# Altium PCB STM32F4.PcbDoc
Units mm, origin at the board's own origin, x right, y up, seen from the top; angles counter-clockwise.
Board outline 37.5 x 37.5 mm, 4 copper layers (L1 (Signal), L2 (GND), L3 (GND), L4 (Signal)), stack 1.57 mm thick; 35 components, 27 nets, 172 pads, 110 vias.
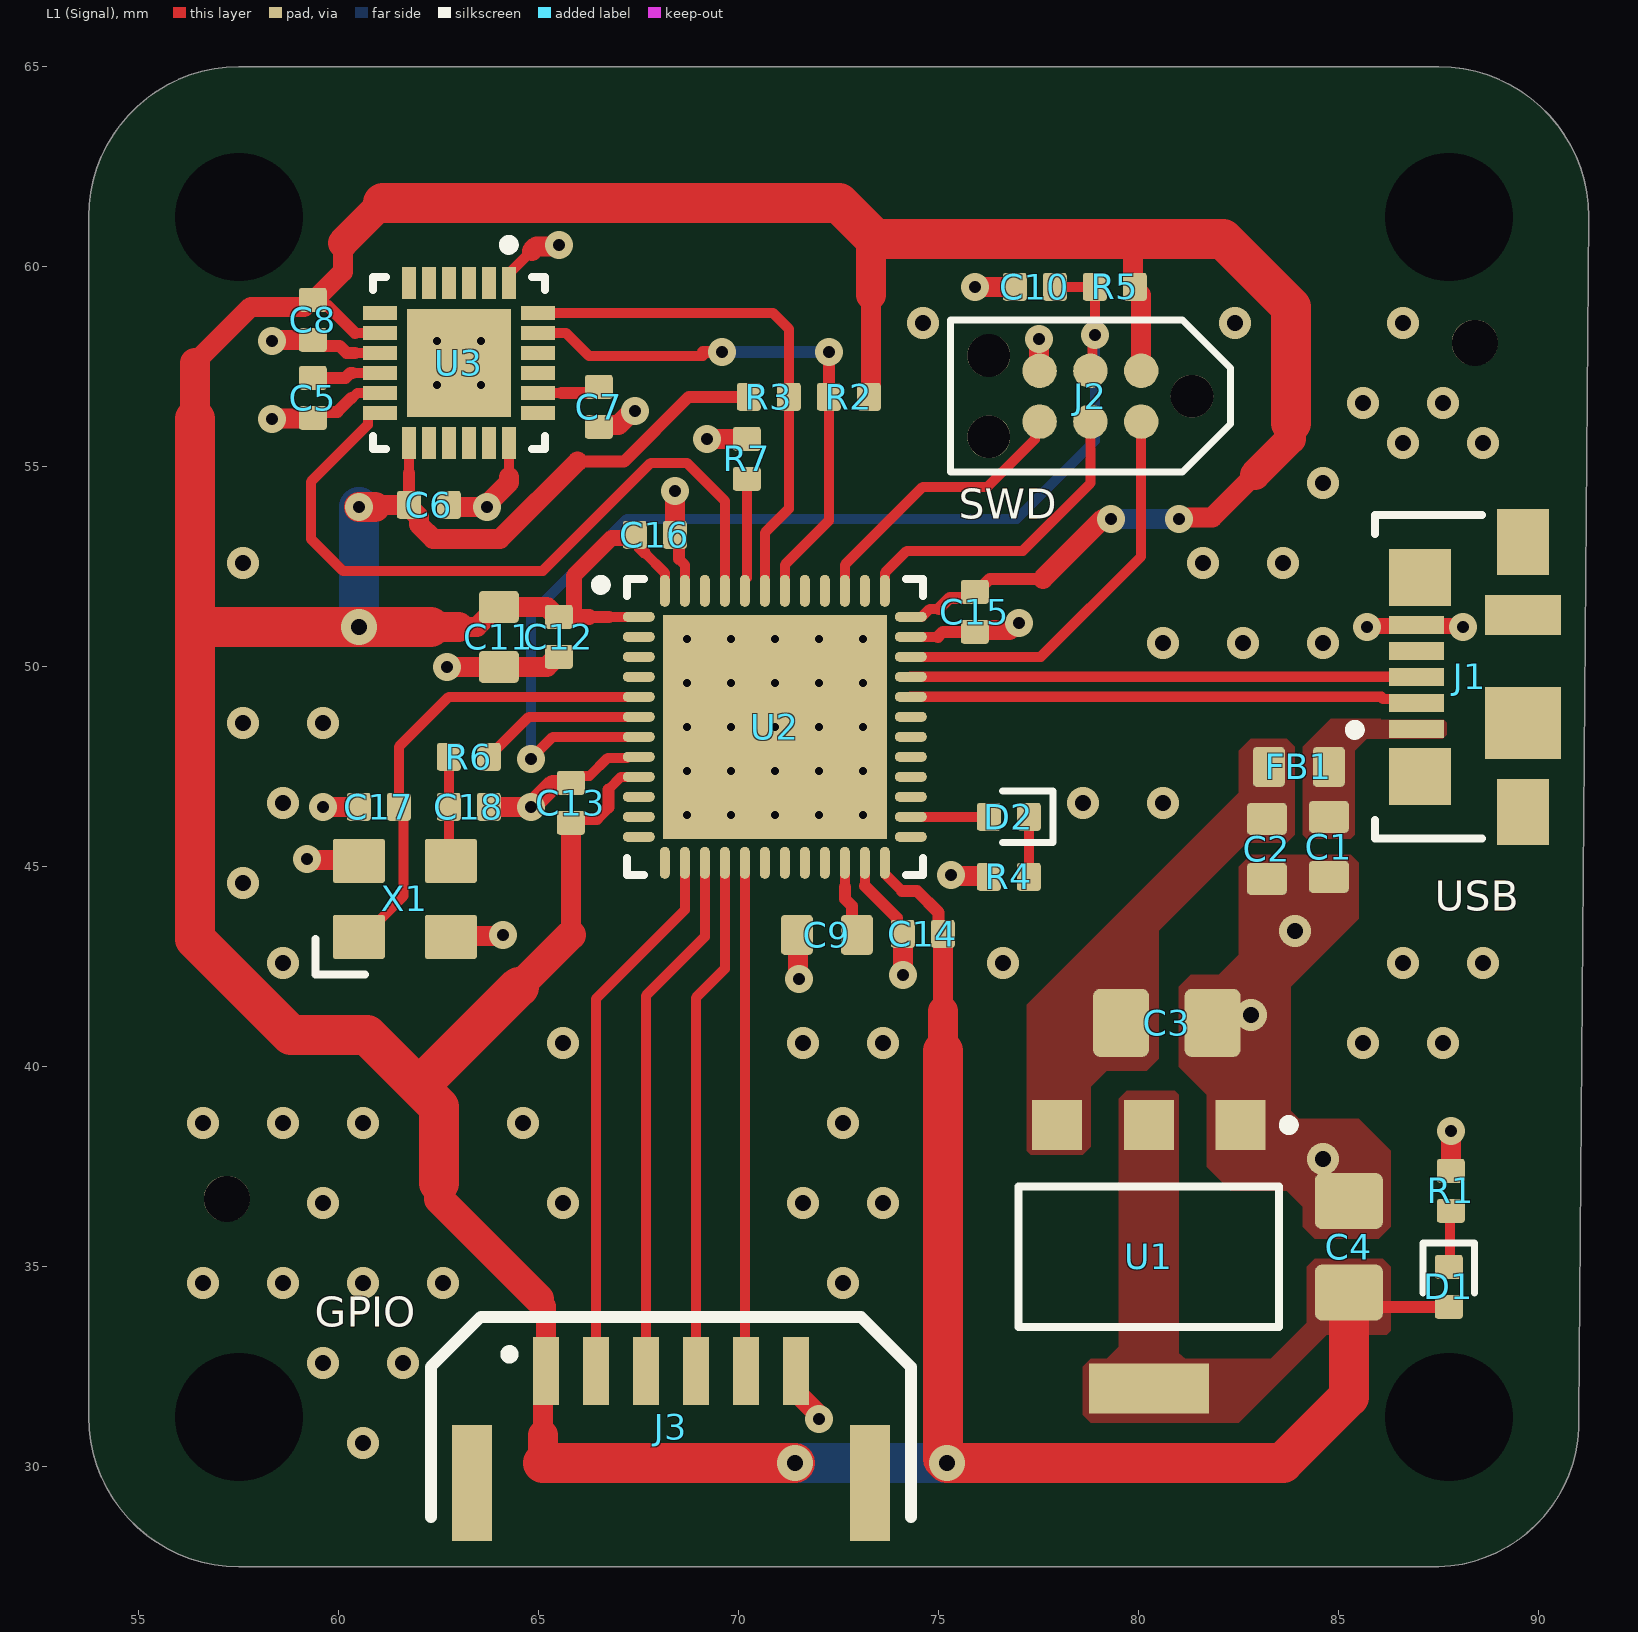
[diagram p0: L1 (Signal) view]
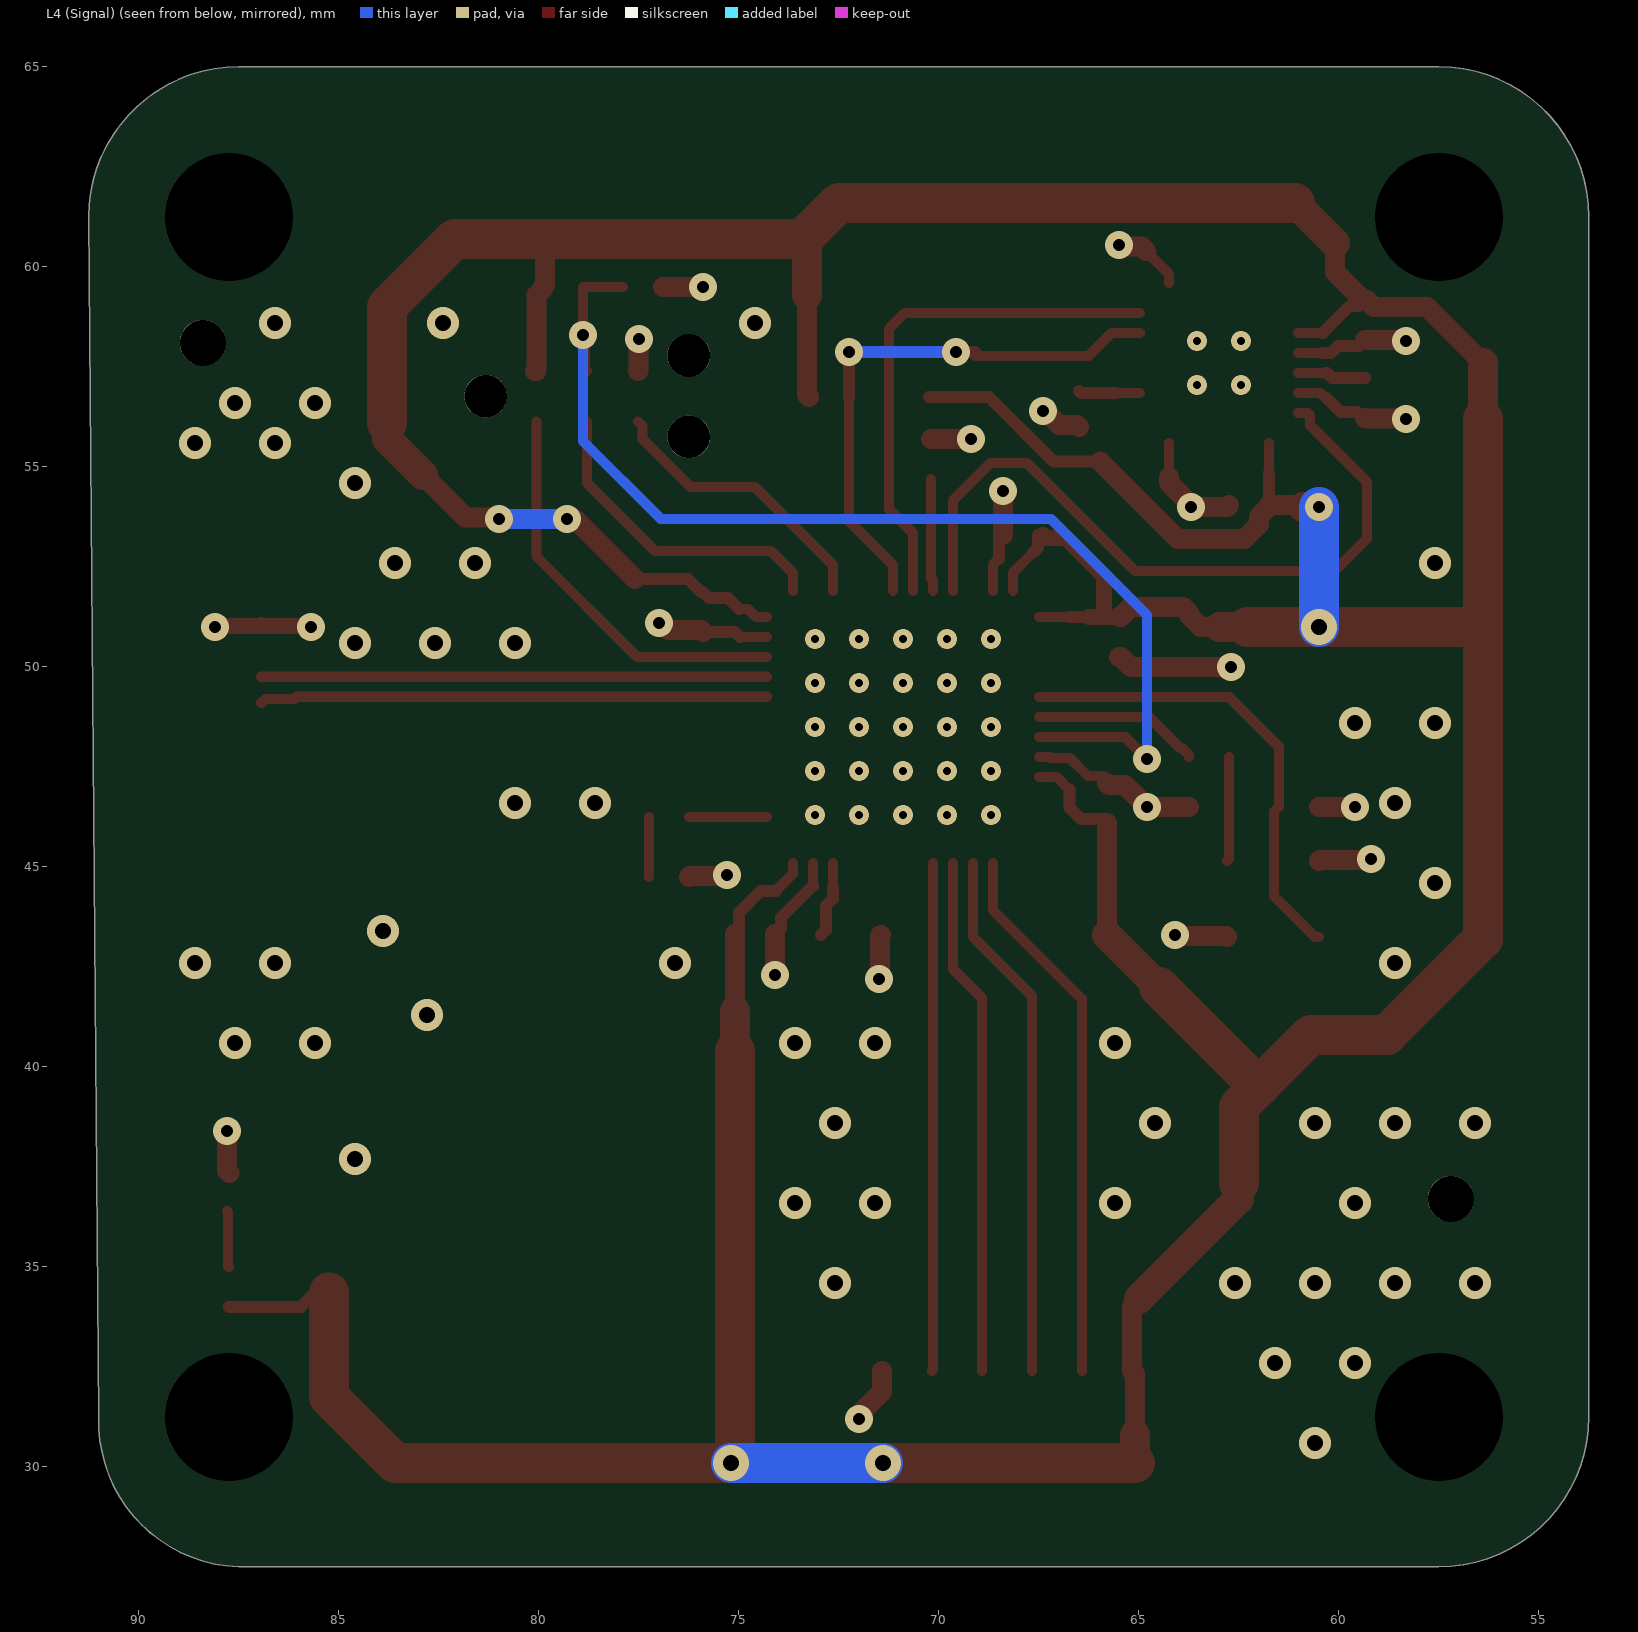
[diagram p1: L4 (Signal) view, seen from below]
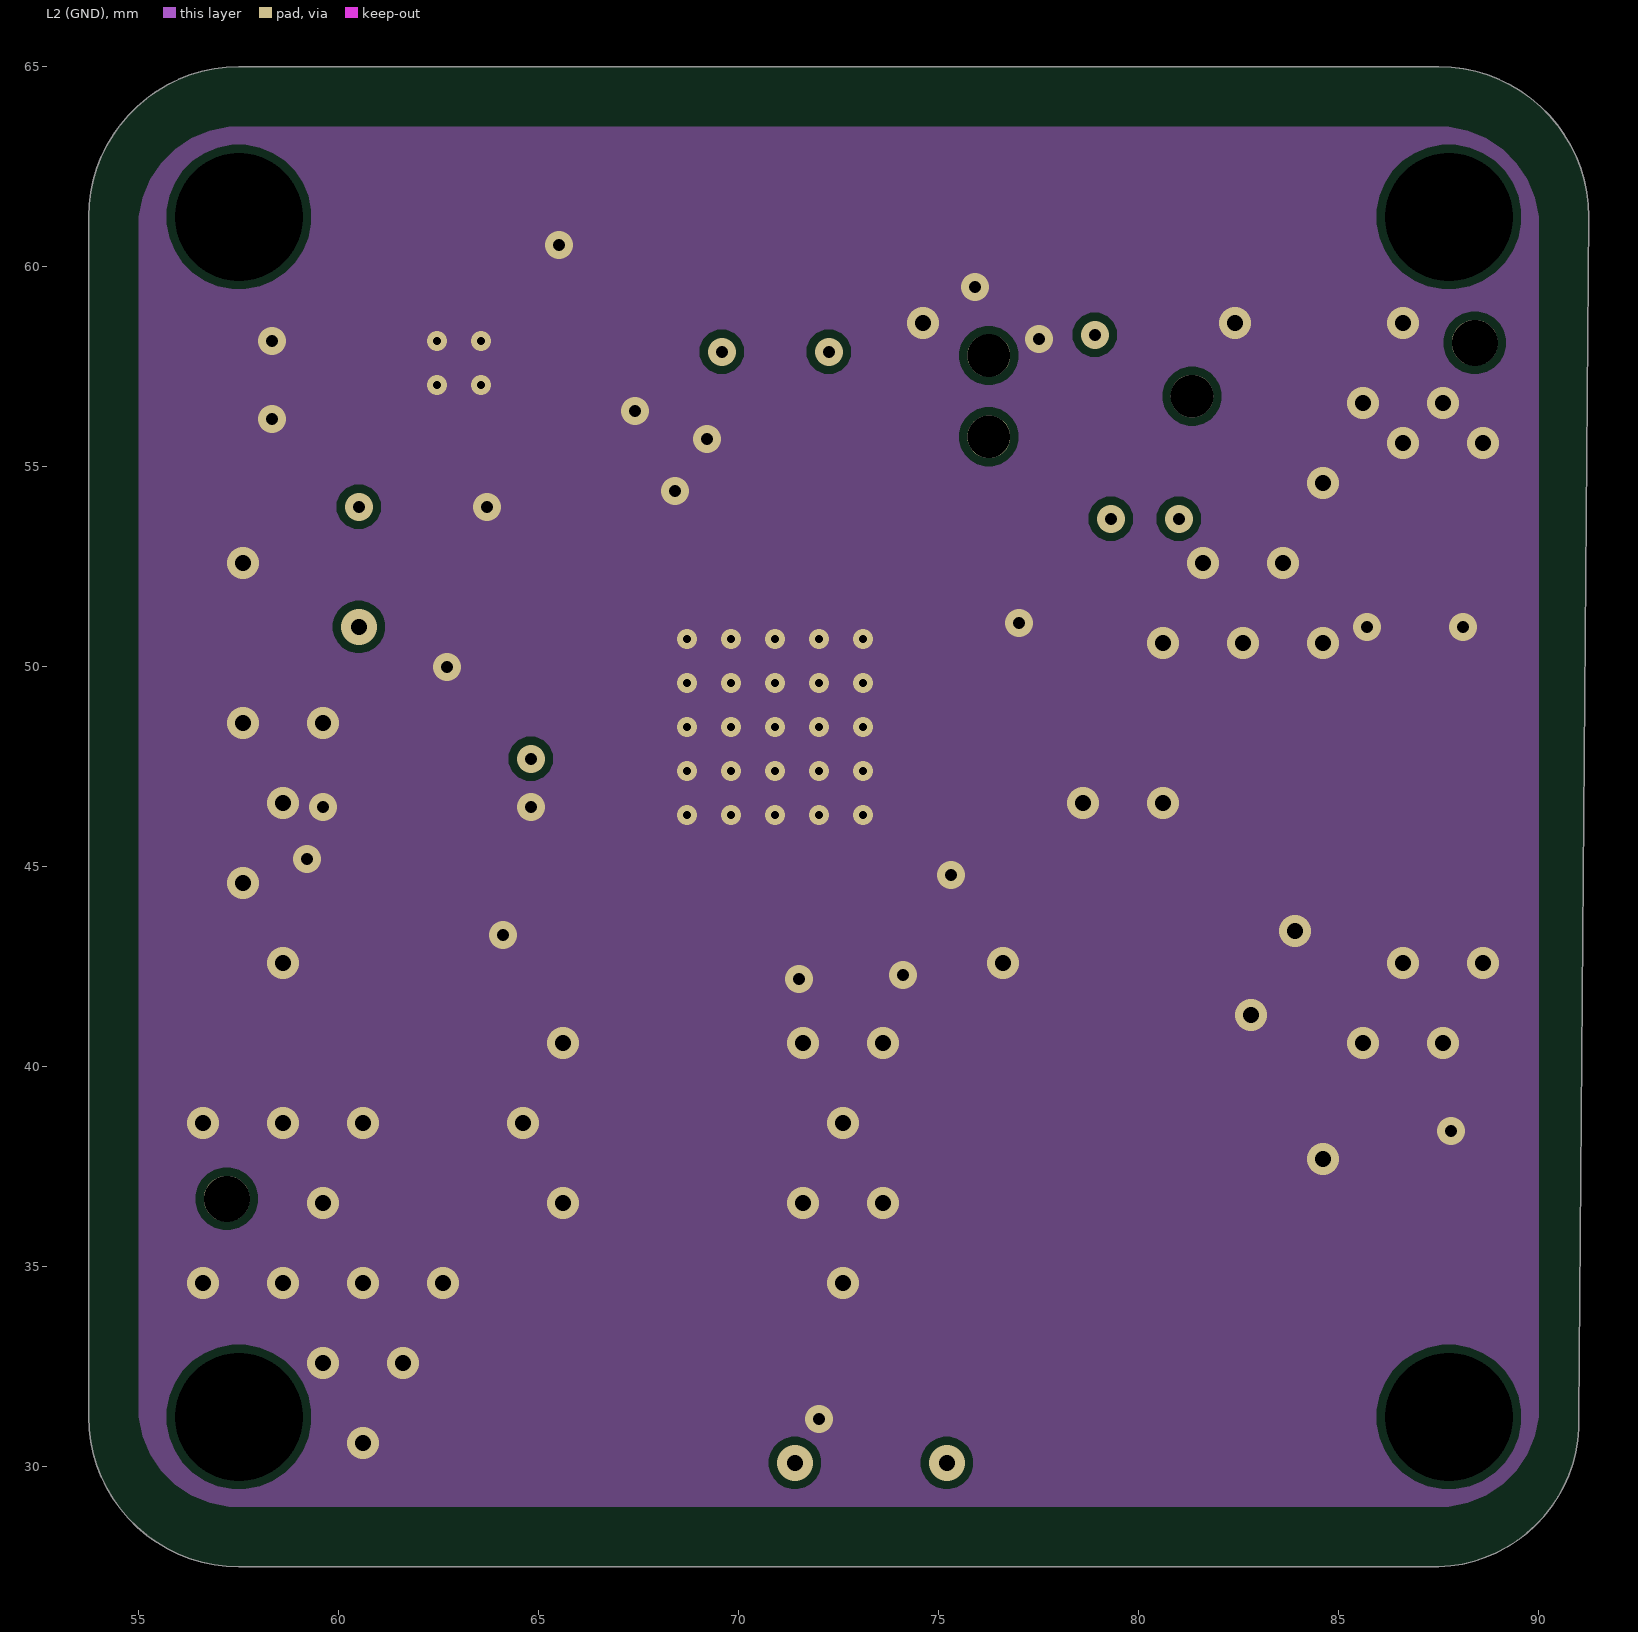
[diagram p2: L2 (GND)]
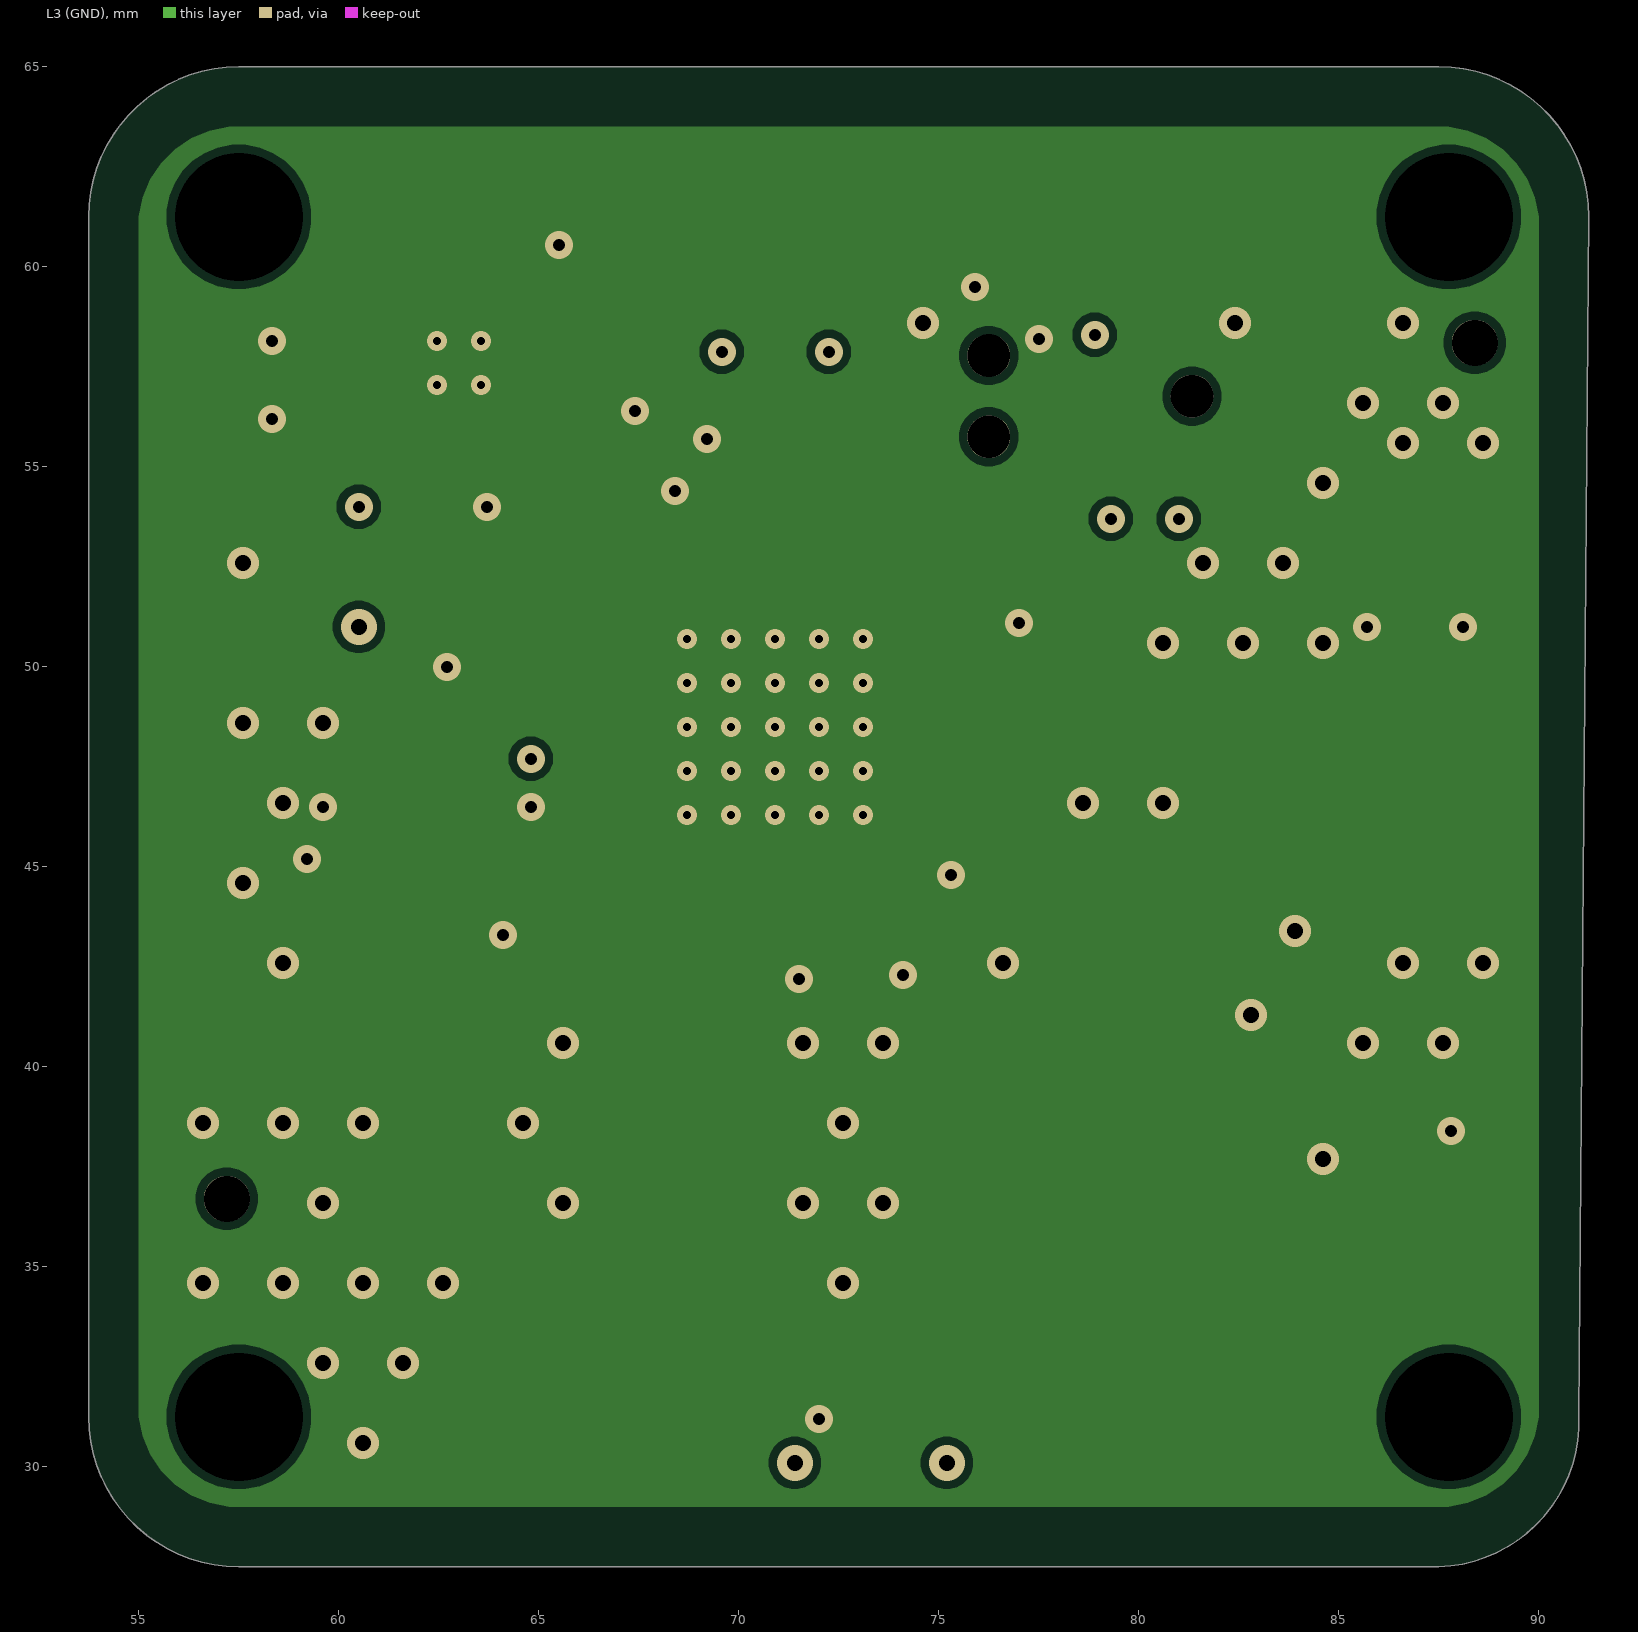
[diagram p3: L3 (GND)]
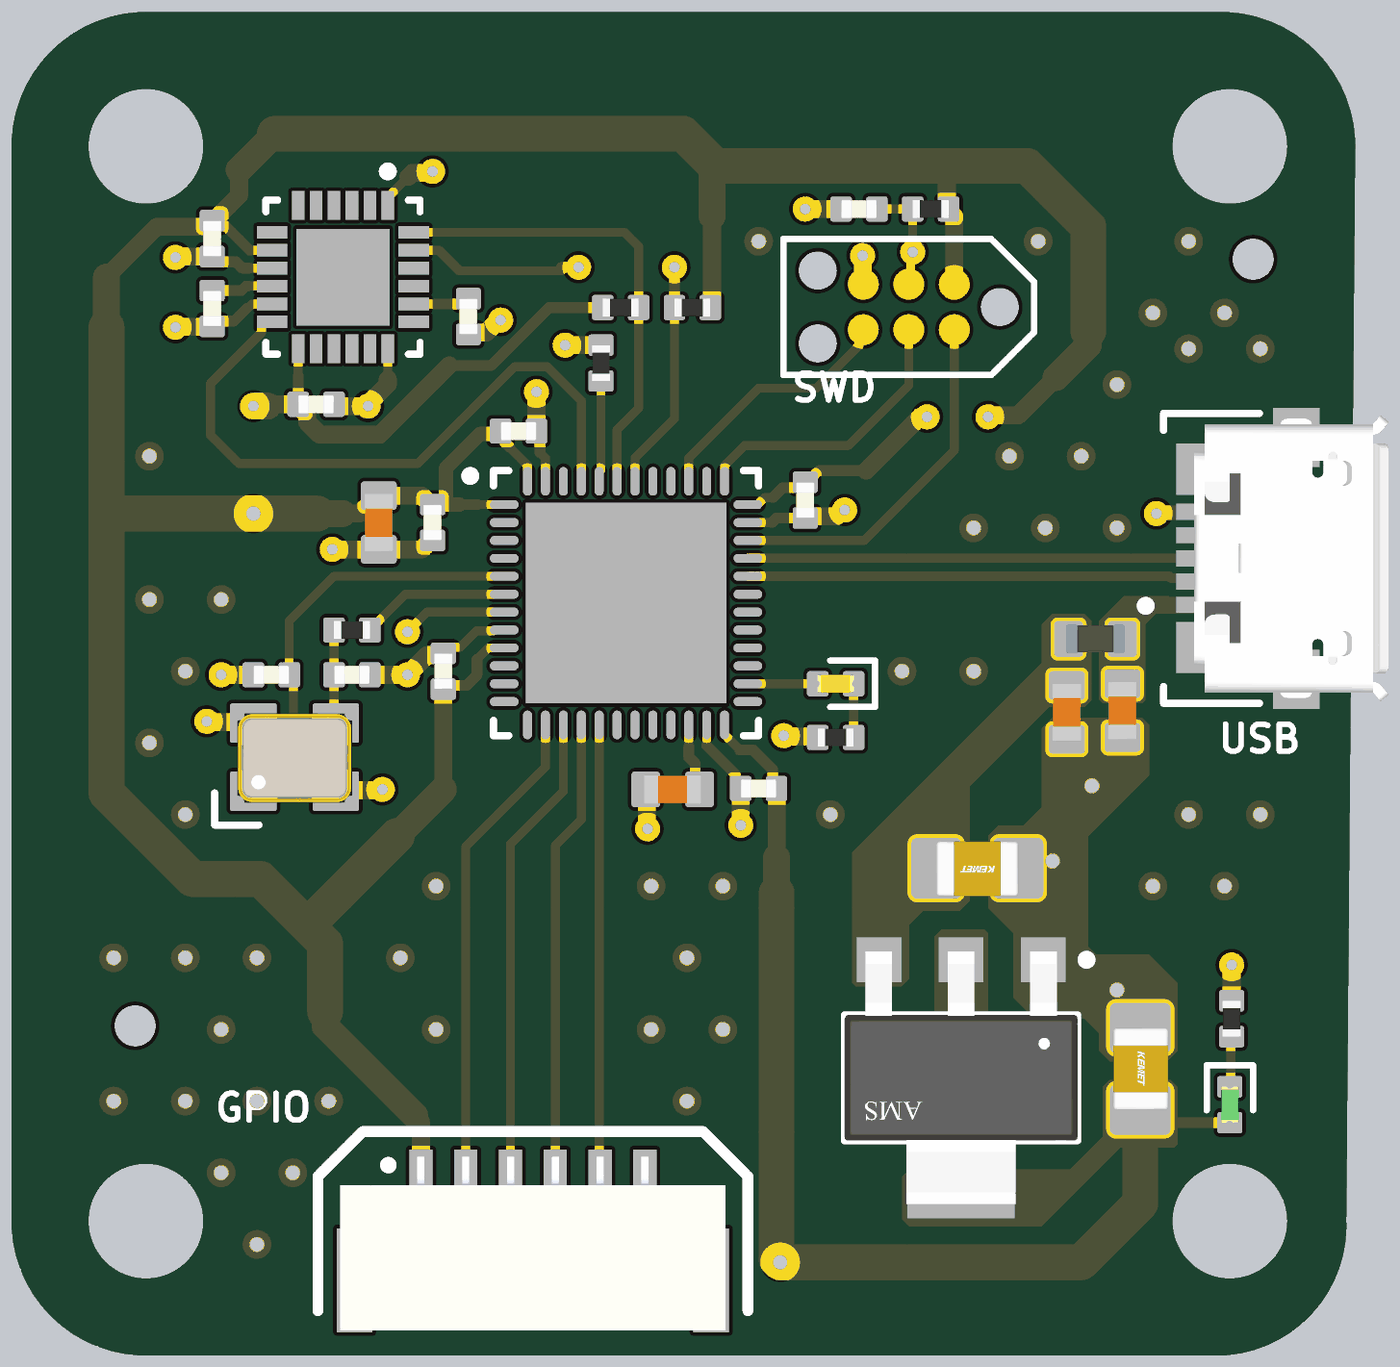
[diagram p4: 3D render of the assembled board from above, using the file's embedded part models]

## Layer stack, top to bottom
Top Solder: solder mask 0.0254, SM-001, Dk 4
L1 (Signal): signal copper 0.035
Dielectric 1: prepreg 0.2, PP-017, Dk 4.6
L2 (GND): signal copper 0.0175
Dielectric 3: core 1.065, Core-039, Dk 4.6
L3 (GND): signal copper 0.0175
Dielectric 5: prepreg 0.2, PP-017, Dk 4.6
L4 (Signal): signal copper 0.035
Bottom Solder: solder mask 0.0254, SM-001, Dk 4

## Board outline
53.75,31.25 ccw(c57.5,31.25) 57.5,27.5 87.5,27.5 ccw(c87.375,31.125) 91,31.25 91.25,61.25 ccw(c87.5,61.25) 87.5,65 57.5,65 ccw(c57.5,61.25) 53.75,61.25

## Design rules (kind name [scope] priority, off if disabled: settings)
Clearance [All] p1: gap=0.2 ignorepadtopadclearanceinfootprint=TRUE
DiffPairsRouting [All] p1: maxlimit=0.254 minlimit=0.2 mostfreqgap=0.254 toplayer_maxgap=0.2 toplayer_prefgap=0.2 toplayer_minwidth=0.26 toplayer_maxwidth=0.26 toplayer_prefwidth=0.26 bottomlayer_maxgap=0.2 bottomlayer_prefgap=0.2 bottomlayer_minwidth=0.26 bottomlayer_maxwidth=0.26 bottomlayer_prefwidth=0.26 impedanceprofiledriven=TRUE impedanceprofileid={2CBDB4BE-5EE6-42D6-8C76-B86D09E34E0D} impedanceprofilevalue=90.000000 maxuncoupledlength=12.7
PolygonConnect [All] p1: connectstyle=Direct reliefconductorwidth=0.254 reliefentries=4 polygonreliefangle="90 Angle" airgapwidth=0.254
RoutingVias [All] p1: holewidth=0.3 width=0.7 viastyle="Through Hole" minholewidth=0.2 minwidth=0.5 maxholewidth=0.4 maxwidth=0.9
SolderMaskExpansion [All] p1: expansion=0.102 istentingtop=FALSE
SupplyNets "Schematic Supply Nets_3" [InNet('VBUS')] p1: voltage=0.000
SupplyNets "Schematic Supply Nets_2" [InNet('+5')] p2: voltage=0.000
SupplyNets "Schematic Supply Nets_1" [InNet('+3v3')] p3: voltage=0.000
SupplyNets "Schematic Supply Nets" [InNet('GND')] p4: voltage=0.000
UnRoutedNet [All] p1: checkbadconnections=TRUE
Width [All] p1: maxlimit=1 minlimit=0.2 preferedwidth=0.3 midlayer1_minwidth=0.254 midlayer1_maxwidth=0.254 midlayer1_prefwidth=0.254 midlayer2_minwidth=0.254 midlayer2_maxwidth=0.254 midlayer2_prefwidth=0.254 minimp=50.000000 maximp=50.000000 favimp=50.000000
28 further rules are at their usual default settings.

## Classes and differential pairs
differential pair class DIFF_USB: USB_D
differential pair USB_D: +USB_D_P -USB_D_N

## Components (designator, comment, footprint, x,y, rotation, side; value= is the part's Value field where it differs from the comment)
C1 "2u2" CAP_0603 84.75,45.5 r90 top
C2 "2u2" CAP_0603 83.2,45.45 r90 top
C3 "22u" CAP_0805 80.7,41.1 r180 top
C4 "22u" CAP_0805 85.25,35.5 r270 top
C5 "100n" CAP_0402 59.35,56.725 r90 top
C6 "10n" CAP_0402 62.25,54.05 r180 top
C7 "2n2" CAP_0402 66.5,56.5 r90 top
C8 "100n" CAP_0402 59.35,58.675 r90 top
C9 "2u2" CAP_0603 72.2,43.3 r0 top
C10 "100n" CAP_0402 77.4,59.5 r0 top
C11 "2u2" CAP_0603 64,50.75 r90 top
C12 "100n" CAP_0402 65.5,50.75 r90 top
C13 "100n" CAP_0402 65.8,46.6 r270 top
C14 "100n" CAP_0402 74.6,43.325 r0 top
C15 "100n" CAP_0402 75.9,51.375 r270 top
C16 "100n" CAP_0402 67.9,53.3 r180 top
C17 "10p" CAP_0402 61,46.5 r0 top
C18 "10p" CAP_0402 63.25,46.5 r180 top
D1 "GREEN" LED_0402_GREEN 87.75,34.5 r90 top
D2 "YELLOW" LED_0402_YELLOW 76.75,46.25 r0 top
FB1 "120R" FB_0603 84,47.5 r180 top
J1 "473460001" FP-473460001-MFG 89.25,49.75 r90 top
J2 "TC2030-NL" TC2030-NL-FP 78.79,56.766 r180 top
J3 "SM06B-GHS-TB" SM06B-GHS-TB 68.3,31 r0 top
R1 "1k" RES_0402 87.8,36.9 r270 top
R2 "2k2" RES_0402 72.75,56.75 r0 top
R3 "2k2" RES_0402 70.75,56.75 r180 top
R4 "1k" RES_0402 76.75,44.75 r180 top
R5 "10k" RES_0402 79.4,59.5 r0 top
R6 "0R" RES_0402 63.25,47.75 r0 top
R7 "10k" RES_0402 70.2,55.2 r270 top
U1 "AMS1117-3.3" FP-AMS1117-IPC_C 80.25,35.25 r270 top
U2 "STM32F411CEU6" STM-UFQFPN48_L 70.9,48.5 r0 top
U3 "MPU-6050" IS-QFN-24_V 63,57.6 r270 top
X1 "24MHz" XTAL_3225 61.65,44.2 r0 top

## Footprints (in the part's own frame and the unit in brackets; to place one, negate y for a bottom-side part, rotate by r counter-clockwise, add the part's x,y. Pads: shape width x height; smd on the part's side, far side on the other; paste and mask are expansions set on the pad)
CAP_0402 [mm]
  rrect25% 0.6x0.7 smd: 1(-0.5,0) 2(0.5,0)
  body extent -0.5,-0.26 0.5,0.26, height 0.37
CAP_0603 [mm]
  rrect25% 0.8x1 smd: 1(-0.75,0) 2(0.75,0)
  body extent -0.8,-0.4 0.8,0.4, height 0.51
CAP_0805 [mm]
  rrect25% 1.4x1.7 smd: 1(-1.143,0) 2(1.143,0)
  body extent -1.15,-0.76 1.15,0.79, height 1.01
FB_0603 [mm]
  rrect25% 0.8x1 smd: 1(-0.75,0) 2(0.75,0)
  body extent -0.8,-0.4 0.8,0.4, height 0.81
FP-473460001-MFG [mm]
  rect 0.45x1.38 smd paste+0 mask+0: 1(-1.3,2.31) 2(-0.65,2.31) 3(0,2.31) 4(0.65,2.31) 5(1.3,2.31)
  rect 1.425x1.55 smd paste+0 mask+0: 6(-2.488,2.225) 7(2.488,2.225)
  rect 1.65x1.3 smd paste+0 mask+0: 8(-3.375,-0.35) 11(3.375,-0.35)
  rect 1.8x1.9 smd paste+0 mask+0: 9(-1.15,-0.35)
  rect 1x1.9 smd paste+0 mask+0: 10(1.55,-0.35)
  silkscreen extent -4.05,0.67 4.05,3.97, body extent -4.3,-2.48 4.3,3.45, height 0.25
FP-AMS1117-IPC_C [mm]
  rect 1.25x1.25 smd paste+0 mask+0: 1(-3.295,2.29) 2(-3.295,0) 3(-3.295,-2.29)
  rect 1.25x3 smd paste+0 mask+0: 4(3.295,0)
  silkscreen extent -3.42,-3.25 1.75,3.63, body extent -3.9,-3.35 3.9,3.35, height 0.25
IS-QFN-24_V [mm] "QFN, 24-Leads, Body 4x4mm, Pitch 0.5mm, Thermal Pad 2.7x2.6mm"
  rect 0.8x0.35 smd: 1(-2,1.25) 2(-2,0.75) 3(-2,0.25) 4(-2,-0.25) 5(-2,-0.75) 6(-2,-1.25) 13(2,-1.25) 14(2,-0.75) 15(2,-0.25) 16(2,0.25) 17(2,0.75) 18(2,1.25)
  rect 0.35x0.85 smd mask+0.102: 7(-1.25,-1.975) 8(-0.75,-1.975) 9(-0.25,-1.975) 10(0.25,-1.975) 11(0.75,-1.975) 12(1.25,-1.975) 19(1.25,1.975) 20(0.75,1.975) 21(0.25,1.975) 22(-0.25,1.975) 23(-0.75,1.975) 24(-1.25,1.975)
  rect 2.7x2.6 smd: 25(0,0)
  silkscreen extent -3.07,-2.15 2.15,2.15, body extent -2,-2 2,2, height 0.95
LED_0402_GREEN [mm]
  rrect25% 0.6x0.7 smd: A(-0.5,0) K(0.5,0)
  silkscreen extent -0.15,-0.65 1.1,0.65, body extent -0.51,-0.25 0.51,0.25, height 0.45
LED_0402_YELLOW [mm]
  rrect25% 0.6x0.7 smd: A(-0.5,0) K(0.5,0)
  silkscreen extent -0.15,-0.65 1.1,0.65, body extent -0.51,-0.25 0.51,0.25, height 0.45
RES_0402 [mm]
  rrect25% 0.6x0.7 smd: 1(-0.5,0) 2(0.5,0)
  body extent -0.5,-0.25 0.5,0.25, height 0.3
SM06B-GHS-TB [mm]
  rect 0.65x1.7 smd: 1(-3.125,1.4) 2(-1.875,1.4) 3(-0.625,1.4) 4(0.625,1.4) 5(1.875,1.4) 6(3.125,1.4)
  rect 1x2.9 smd: ""(-4.975,-1.4) ""(4.975,-1.4)
  silkscreen extent -6,-2.25 6,2.75, body extent -5.38,-2.8 5.38,2.05, height 4.26
STM-UFQFPN48_L [mm] "QFN, 48-Leads, Body 7.1x7.1mm, Pitch 0.5mm, Thermal Pad 5.6x5.6mm, IPC High Density"
  oval 0.8x0.25 smd: 1(-3.4,2.75) 2(-3.4,2.25) 3(-3.4,1.75) 4(-3.4,1.25) 5(-3.4,0.75) 6(-3.4,0.25) 7(-3.4,-0.25) 8(-3.4,-0.75) 9(-3.4,-1.25) 10(-3.4,-1.75) 11(-3.4,-2.25) 12(-3.4,-2.75) 25(3.4,-2.75) 26(3.4,-2.25) 27(3.4,-1.75) 28(3.4,-1.25) 29(3.4,-0.75) 30(3.4,-0.25) 31(3.4,0.25) 32(3.4,0.75) 33(3.4,1.25) 34(3.4,1.75) 35(3.4,2.25) 36(3.4,2.75)
  oval 0.25x0.8 smd: 13(-2.75,-3.4) 14(-2.25,-3.4) 15(-1.75,-3.4) 16(-1.25,-3.4) 17(-0.75,-3.4) 18(-0.25,-3.4) 19(0.25,-3.4) 20(0.75,-3.4) 21(1.25,-3.4) 22(1.75,-3.4) 23(2.25,-3.4) 24(2.75,-3.4) 37(2.75,3.4) 38(2.25,3.4) 39(1.75,3.4) 40(1.25,3.4) 41(0.75,3.4) 42(0.25,3.4) 43(-0.25,3.4) 44(-0.75,3.4) 45(-1.25,3.4) 46(-1.75,3.4) 47(-2.25,3.4) 48(-2.75,3.4)
  rect 5.6x5.6 smd: 49(0,0)
  silkscreen extent -4.47,-3.7 3.7,3.7, body extent -3.55,-3.55 3.55,3.55, height 0.6
TC2030-NL-FP [mil]
  round 33.98 smd paste-16.99: 1(-50,-25) 2(-50,25) 3(0,-25) 4(0,25) 5(50,-25) 6(50,25)
  round 42.01 hole 42.01 unplated: MH(-100,0) MH(100,-40) MH(100,40)
  silkscreen extent -138,-75 138,75
XTAL_3225 [mm]
  rrect10% 1.3x1.1 smd: 1(-1.15,-0.95) 2(1.15,-0.95) 3(1.15,0.95) 4(-1.15,0.95)
  silkscreen extent -2.23,-1.89 -1,-1, body extent -1.6,-1.28 1.6,1.22, height 0.61

## Part data
C1 C2 C9 C11: library part CAP_0603, "Capacitor SMD 0603"
C3 C4: library part CAP_0805, "Capacitor SMD 0805"
C5 C6 C7 C8 C10 C12 C13 C14 C15 C16 C17 C18: library part CAP_0402, "Capacitor SMD 0402"
D1: library part LED_0402_GREEN, "LED 0402 GREEN SMD"
D2: library part LED_0402_YELLOW, "LED 0402 YELLOW SMD"
FB1: library part FB_0603, "Ferrite Bead SMD 0603"
J1: library part CMP-2000-05246-2, "CONN RCPT USB2.0 MICRO B SMD R/A", Current Rating=1.8A, Manufacturer=Molex, Package=0, Temperature="-30°C to +85°C", Temperature Range High=+85°C, Temperature Range Low=-30°C, Voltage Rating=30V, Automotive=No, Category=Conn, ComponentLink2Description=Datasheet, ComponentLink2URL=https://www.molex.com/webdocs/datasheets/pdf/en-us/0473460001_IO_CONNECTORS.pdf, Conn Orientation="Right Angle", Contact Material=Gold,Nickel, Device Class L1=Connectors, Device Class L2="USB Connectors", Device Class L3=unset, Digikey Description="CONN RCPT USB2.0 MICRO B SMD R/A", Footprint Url=https://www.molex.com/pdm_docs/sd/473460001_sd.pdf, Height=2.945mm, Is Female=yes, Lead Free=Yes, Manufacturer Part Number=473460001, Number Of Contacts=5, Octopart=https://octopart.com/47346-0001-molex-7164928, Pitch=0.65mm, RoHS=TRUE, Shielding=true, Usb Standard="USB 2.0"
J2: "Tag-Connect No-Solder SWD Debug Connector (No Legs) DO NOT PLACE", Manufacturer=Tag-Connect, Manufacturer Part Number=TC2030-NL-FP
J3: "Header Connector 6 Position 1.25MM Pitch SMD Horizontal JST GH", Manufacturer=JST, Manufacturer Part Number=SM06B-GHS-TB
R1 R2 R3 R4 R5 R6 R7: library part RES_0402, "Resistor SMD 0402"
U1: library part CMP-209535-000001-1, "LDO Voltage Regulators 1A, 3.3V", Dropout Voltage=1.1V, Manufacturer="Advanced Monolithic Systems", Max Junction Temp=+125°C, Max Power Dissipation=1.2W, Max Supply Voltage=15V, Nominal Supply Current=5mA, Output Current=1A, Output Voltage=3.3V, Package=AMS1117, Temperature="-40°C to +125°C", Temperature Range Low=-40°C, Automotive=No, Category=IC, ComponentLink2Description=Datasheet, ComponentLink2URL=http://www.advanced-monolithic.com/pdf/ds1117.pdf, Device Class L1="Integrated Circuits (ICs)", Device Class L2="Power Management ICs", Device Class L3="Voltage Regulators - Linear", Height=1.8mm, Ipc Land Pattern Name=SOT229P700X180-4, Lead Free=Yes, Manufacturer Part Number=AMS1117-3.3, Number Of Outputs=1, Octopart=https://octopart.com/ams1117-3.3-advanced+monolithic+systems-25899300, Output Type=Fixed, RoHS=TRUE, Standoff Height=0.64mm, Temperature Range High=+125°C
U2: library part CMP-0243-00165-1, "ARM Cortex-M4 32-bit MCU+FPU, 512 KB Flash, 128 KB RAM, 36 I/Os, 48-Pin UFQFPN, -40 to 85 degC, Tray", I/Os (High Current)=36, Operating Frequency(F) (Processor speed) (MHz)=100, Package Description=UFQFPN48, Package Reference="48-Pin Ultra Thin Fine Pitch Quad Flat No-Lead, 7 x 7 x 0.6 mm Body, 0.5 mm Pitch, Exposed Pad", Supply Voltage(Vcc) min (V)=1.7, ComponentLink1Description="Manufacturer URL", ComponentLink1URL=http://www.st.com/, ComponentLink2Description=Datasheet, ComponentLink2URL=http://www.st.com/st-web-ui/static/active/en/resource/technical/document/datasheet/DM00115249.pdf, Core="ARM Cortex-M4", DatasheetVersion="Rev. 6", FLASH Size (Prog) (kB)=512, Internal RAM Size (kB)=128, Mounting Technology="Surface Mount", Packing=Tray
U3: library part CMP-1753-00002-2, "3-Axis Gyroscope, Accelerometer and a Digital Motion Processor(TM) (DMP), 2.375 to 3.46 V, -40 to 85 degC, 24-Pin QFN, RoHS, Tape and Reel", Manufacturer=InvenSense, Standard Package=5,000, Category=Sensors,Transducers, Datasheet URL=http://datasheet.octopart.com/MPU-6050-InvenSense-datasheet-14421344.pdf, Datasheet Version="Rev. 3.3, 05/2012", Dynamic Catalog=MPU-6000™Series, Family=Multifunction, Featured Product=MPU-60506-Axis,IntegratedI²CSolution, Manufacturer URL=http://www.invensense.com/, Online Catalog=MPU-6000™Series, Other Names="1428-1007-2 / MPU6050", Output Type=Digital, Sensor Type=MotionTracking, Unit PriceUSD=Digital
X1: library part TSX-3225_24.0000MF15X-AC, "Crystal SMD 24MHz 10PPM 7pF 3225", Manufacturer=Epson, Manufacturer Part Number="TSX-3225 24.0000MF15X-AC"

## Free pads (board coordinates)
  round 1.524 hole 3.2 unplated: MH(57.5,31.25) MH(57.5,61.25) MH(87.75,31.25) MH(87.75,61.25)
  round 1.152 hole 1.152 unplated: TH(57.2,36.7) TH(88.4,58.1)

## Via types
v1: diameter 0.8, hole 0.4, L1 (Signal) to L4 (Signal), tented both sides, 49 vias
v2: diameter 0.7, hole 0.3, L1 (Signal) to L4 (Signal), 29 vias
v3: diameter 0.5, hole 0.2, L1 (Signal) to L4 (Signal), 29 vias
v4: diameter 0.9, hole 0.4, L1 (Signal) to L4 (Signal), 3 vias

## Nets (pads, with @x,y where several pads share a name; then routed paths per layer and width w, separated by ;. In a path a pad name is that pad's centre, name@x,y a point inside that pad or via, vN(x,y) a via of type N, cw(c..) or ccw(c..) an arc to the next point about the centre after c; other vN are vias at no path point)
+3v3: C4.2 C6.2 C8.2 C11.2 C12.2 C13.2 C14.2 C15.1 C16.2 D1.A J2.1 J3.1 R2.2 R3.2 R5.2 U1.2 U1.4 U2.1 U2.9 U2.24 U2.36 U2.48 U3.8 U3.13 | length 171.5
  L1 (Signal) w0.25: 60.4,58.35 U3.8 ; 61.75,54.85 U3.13 ; 66.739,46.936 67.053,47.25 U2.9 ; 66.75,51.25 U2.1 ; 67.645,52.855 68.15,52.35 U2.48 ; U2.24 73.65,44.825 74.075,44.4 ; U2.36 74.575,51.25 74.775,51.45 75,51.45
  L1 (Signal) w0.3: C8.2 59.5,59.025 59.725,59.025 60.4,58.35 ; C6.2 61.75,54.85 ; C13.2@65.8,46.2 66.45,46.2 66.739,46.489 66.739,46.936 ; 65.966,55.134 67.134,55.134 68.75,56.75 R3.2 ; 66.25,51.25 66.75,51.25 ; C16.2@67.521,53.3 67.521,52.979 67.645,52.855 ; 74.075,44.4 74.45,44.4 74.991,43.859 74.991,43.434 C14.2 ; 75,51.45 75.275,51.725 75.75,51.725 C15.1 75.95,51.875 76.275,52.2 77.6,52.2 ; C4.2 85.591,34.357 85.948,34 D1.A
  L1 (Signal) w0.4: C12.2 65.875,51.25 ; 66.25,51.25 65.875,51.25 ; C16.2 67.323,53.223 66.823,53.223 65.875,52.275 65.875,51.25
  L1 (Signal) w0.5: 56.4,57.6 57.8,59 59.125,59 59.3,59.175 C8.2 59.4,59.175 60.1,59.875 60.1,60.6 ; 60.9,54 60.95,54.05 C6.2 61.75,54 62,53.75 62,53.558 62.358,53.2 64.031,53.2 65.966,55.134 ; 62.986,51 63.457,51 63.75,51.293 63.75,51.35 63.9,51.5 C11.2 65.2,51.5 65.45,51.25 C12.2 ; 65,34.2 65.175,34.025 J3.1 65.1,32.325 65.1,30.8 ; 65.8,43.3 C13.2 ; R2.2 73.3,56.8 73.3,59.3 ; 75.1,41.4 75.1,41.9 C14.2 ; 77.6,52.2 79.1,53.7 v2(79.3,53.7) ; 79.85,60.348 79.85,59.55 R5.2 ; R5.2@79.9,59.45 80.06,59.29 80.06,57.44 J2.1@80.099,57.401 ; J2.1 J2.1@80.099,57.401 ; J2.1@80.1,57.4 J2.1@80.099,57.401 ; v2(81,53.7) 81.038,53.738 81.838,53.738 82.9,54.8
  L1 (Signal) w0.75: 56.4,56.2 56.4,57.6 ; 60.1,60.6 61.1,61.6 ; v2(60.5,54) 60.9,54 ; 62.286,51 62.986,51 ; 62.5,37.1 62.5,36.7 65,34.2 ; 64.5,42 65.8,43.3 ; 65.1,30.1 65.1,30.8 ; 73.3,59.3 73.3,60.8 ; 75.1,40.4 75.1,41.4 ; 82.9,54.8 83.8,55.7 83.8,56.1
  L1 (Signal) w1: 56.4,56.2 56.4,51 ; 61.1,61.6 72.5,61.6 73.3,60.8 73.4,60.7 79.85,60.7 82.1,60.7 83.8,59 83.8,56.1 ; 62.286,51 v4(60.5,51) 56.4,51 ; 62.5,37.1 62.5,39 62,39.5 ; 64.5,42 62,39.5 ; 65.1,30.1 v4(71.4,30.1) ; 75.1,40.4 75.1,30.2 v4(75.2,30.1) 83.6,30.1 85.25,31.75 C4.2 ; 56.4,51 56.4,43.2 58.8,40.8 60.7,40.8 62,39.5
  L4 (Signal) w0.5: v2(79.3,53.7) v2(81,53.7)
  L4 (Signal) w1: v4(60.5,51) v2(60.5,54) ; v4(71.4,30.1) v4(75.2,30.1)
+5: C2.2 C3.2 FB1.2 U1.3
GND: C1.1 C2.1 C3.1 C4.1 C5.1 C6.1 C7.1 C8.1 C9.1 C10.1 C11.1 C12.1 C13.1 C14.1 C15.2 C16.1 C17.1 C18.1 J1.5 J2.5 J3.6 R1.1 R4.2 R7.1 U1.1 U2.8 U2.23 U2.35 U2.47 U2.49 U3.1 U3.9 U3.11 U3.18 U3.25 X1.2 X1.4 | length 40.5
  L1 (Signal) w0.25: 60.313,56.725 60.34,56.725 60.465,56.85 U3.11 ; 60.4,57.85 U3.9 ; 64.25,54.75 U3.18 ; U3.1 64.25,59.825 64.825,60.4 ; C13.1@65.8,47.2 65.868,47.268 66.268,47.268 66.725,47.725 67.2,47.725 67.225,47.75 U2.8 ; 68.5,52.7 68.65,52.55 U2.47 ; 73.15,44.525 U2.23 ; U2.35 74.975,50.75
  L1 (Signal) w0.3: C8.1 59.5,58.025 60.018,58.025 60.193,57.85 60.4,57.85 ; C5.1@59.45,56.275 59.55,56.375 59.963,56.375 60.313,56.725 ; C16.1 68.5,53.2 68.5,52.7 ; 73.15,44.525 73.95,43.725 73.95,43.475 C14.1 ; 74.975,50.75 75.1,50.875 C15.2
  L1 (Signal) w0.4: v2(85.7,51) 85.725,51.025 86.915,51.025 J1.5 86.965,51.025 88.075,51.025 v2(88.1,51)
  L1 (Signal) w0.5: v2(58.325,56.2) 58.337,56.212 59.337,56.212 C5.1 ; v2(58.325,58.15) cw(c58.35,58.15) 58.35,58.175 C8.1 ; v2(59.2,45.2) 59.225,45.175 60.475,45.175 X1.4 ; v2(59.6,46.5) C17.1 ; v2(62.7,50) C11.1 65.2,50 65.45,50.25 C12.1 ; C6.1 ccw(c62.8,54.05) 62.8,54 v2(63.7,54) 63.7,54.054 64.25,54.604 64.25,54.75 ; X1.2 62.825,43.275 64.075,43.275 v2(64.1,43.3) ; C18.1 v2(64.8,46.5) 65.35,47.05 65.75,47.05 C13.1 ; 64.825,60.4 64.937,60.512 65.462,60.512 v2(65.5,60.55) ; C7.1 66.55,56.05 66.996,56.05 67.346,56.4 v2(67.4,56.4) ; C16.1 v2(68.4,54.4) ; v2(69.2,55.7) R7.1 ; J3.6 71.425,31.875 71.962,31.338 71.962,31.238 v2(72,31.2) ; C9.1 71.475,43.275 71.475,42.225 v2(71.5,42.2) ; v2(74.1,42.3) C14.1 ; v2(75.3,44.8) 75.325,44.775 76.225,44.775 R4.2 ; C15.2 75.95,50.925 76.771,50.925 76.946,51.1 v2(77,51.1) ; v2(75.9,59.5) C10.1 ; v2(77.5,58.2) 77.51,58.19 77.51,57.411 J2.5 ; R1.1@87.738,37.35 87.8,37.412 v2(87.8,38.4)
  other v1: 60.6,30.6 59.6,32.6 61.6,32.6 56.6,34.6 58.6,34.6 60.6,34.6 62.6,34.6 72.6,34.6 59.6,36.6 65.6,36.6 71.6,36.6 73.6,36.6 84.6,37.7 56.6,38.6 58.6,38.6 60.6,38.6 64.6,38.6 72.6,38.6 65.6,40.6 71.6,40.6 73.6,40.6 85.6,40.6 87.6,40.6 82.8,41.3 58.6,42.6 76.6,42.6 86.6,42.6 88.6,42.6 83.9,43.4 57.6,44.6 58.6,46.6 78.6,46.6 80.6,46.6 57.6,48.6 59.6,48.6 80.6,50.6 82.6,50.6 84.6,50.6 57.6,52.6 81.6,52.6 83.6,52.6 84.6,54.6 86.6,55.6 88.6,55.6 85.6,56.6 87.6,56.6 74.6,58.6 82.4,58.6 86.6,58.6
  other v3: 68.7,46.3 69.8,46.3 70.9,46.3 72,46.3 73.1,46.3 68.7,47.4 69.8,47.4 70.9,47.4 72,47.4 73.1,47.4 68.7,48.5 69.8,48.5 70.9,48.5 72,48.5 73.1,48.5 68.7,49.6 69.8,49.6 70.9,49.6 72,49.6 73.1,49.6 68.7,50.7 69.8,50.7 70.9,50.7 72,50.7 73.1,50.7 62.45,57.05 63.55,57.05 62.45,58.15 63.55,58.15
IMU_CPOUT: C7.2 U3.20 | length 1.5
  L1 (Signal) w0.25: U3.20 65.568,56.85 65.57,56.848
  L1 (Signal) w0.3: 65.57,56.848 66.448,56.848 C7.2@66.5,56.9
IMU_INT: U2.45 U3.12 | length 18.5
  L1 (Signal) w0.25: U3.12 60.775,56.35 60.725,56.3 60.725,56.05 59.3,54.625 59.3,53.2 60.1,52.4 65.1,52.4 67.8,55.1 68.7,55.1 69.65,54.15 U2.45
IMU_REGOUT: C5.2 U3.10 | length 1.7
  L1 (Signal) w0.25: 60.347,57.35 U3.10
  L1 (Signal) w0.3: C5.2 60.169,57.225 60.294,57.35 60.347,57.35
IMU_SCL: R2.1 U2.42 U3.23 | length 13.9
  L1 (Signal) w0.25: U3.23 65.675,58.35 66.25,57.775 69.1,57.775 ; U2.42 71.15,52.55 72.25,53.65 R2.1
  L1 (Signal) w0.3: 69.1,57.875 v2(69.575,57.875) ; R2.1 v2(72.25,57.875)
  L4 (Signal) w0.3: v2(69.575,57.875) v2(72.25,57.875)
IMU_SDA: R3.1 U2.43 U3.24 | length 13.2
  L1 (Signal) w0.25: U3.24 70.85,58.85 70.9,58.8 71.25,58.45 R3.1 71.25,53.95 70.65,53.35 U2.43
LED_PWR_K: D1.K R1.2 | length 1.4
  L1 (Signal) w0.25: D1.K 87.775,35.025 87.775,36.375 R1.2
MCU_BOOT0: R7.2 U2.44 | length 2.8
  L1 (Signal) w0.25: U2.44 70.15,52.175 70.2,52.225 R7.2
MCU_LED_A: D2.A U2.26 | length 1.9
  L1 (Signal) w0.25: U2.26 D2.A
MCU_LED_K: D2.K R4.1 | length 1.5
  L1 (Signal) w0.25: R4.1 D2.K
MCU_NRST: C10.2 J2.3 R5.1 U2.7 | length 28.1
  L1 (Signal) w0.25: v2(64.8,47.7) 65.35,48.25 U2.7 ; C10.2 R5.1 v2(78.9,58.3) 78.845,58.245 78.845,57.456 J2.3
  L4 (Signal) w0.25: v2(64.8,47.7) 64.8,51.3 67.2,53.7 76.954,53.7 78.9,55.646 v2@78.9,58.2
MCU_OSC_IN: C17.2 U2.5 X1.1 | length 11.8
  L1 (Signal) w0.25: X1.1 60.6,43.25 61.379,44.029 61.382,44.029 61.618,44.265 61.618,46.382 C17.2 61.5,48 62.75,49.25 U2.5
MCU_OSC_OUT: R6.2 U2.6 | length 4.2
  L1 (Signal) w0.25: R6.2 63.75,47.8 63.925,47.975 63.975,47.975 64.75,48.75 U2.6
MCU_PA4: J3.2 U2.14 | length 13.6
  L1 (Signal) w0.25: J3.2 66.425,41.698 68.65,43.923 U2.14
MCU_PA5: J3.3 U2.15 | length 13.3
  L1 (Signal) w0.25: J3.3 67.675,41.775 69.15,43.25 U2.15
MCU_PA6: J3.4 U2.16 | length 13
  L1 (Signal) w0.25: J3.4 68.925,41.725 69.65,42.45 U2.16
MCU_PA7: J3.5 U2.17 | length 12.7
  L1 (Signal) w0.25: U2.17 70.15,32.425 J3.5
MCU_SWCLCK: J2.4 U2.37 | length 8.1
  L1 (Signal) w0.25: U2.37 73.65,52.35 74.2,52.9 77.1,52.9 78.79,54.59 J2.4
MCU_SWDIO: J2.2 U2.34 | length 10.2
  L1 (Signal) w0.25: U2.34 77.55,50.25 80.06,52.76 J2.2
MCU_SWO: J2.6 U2.39 | length 7.2
  L1 (Signal) w0.25: U2.39 72.65,52.55 74.6,54.5 76.214,54.5 77.403,55.689 77.403,56.014 J2.6
MCU_VCAP1: C9.2 U2.22 | length 1.9
  L1 (Signal) w0.25: 72.65,44.5 U2.22
  L1 (Signal) w0.3: 72.65,44.5 72.65,44.2 72.825,44.025 72.825,43.425 C9.2
USB_D_N: J1.2 U2.32 | length 12.7
  L1 (Signal) w0.26: U2.32 86.058,49.25 86.113,49.195 86.845,49.195 J1.2
USB_D_P: J1.3 U2.33 | length 12.6
  L1 (Signal) w0.26: U2.33 J1.3
VBUS: C1.2 FB1.1 J1.1
XTAL_IN: C18.2 R6.1 X1.3 | length 2.6
  L1 (Signal) w0.25: R6.1 62.75,45.2 X1.3
pads on no net: J1.4 J1.6 J1.7 J1.8 J1.9 J1.10 J1.11 J2.MH J3. U2.2 U2.3 U2.4 U2.10 U2.11 U2.12 U2.13 U2.18 U2.19 U2.20 U2.21 U2.25 U2.27 U2.28 U2.29 U2.30 U2.31 U2.38 U2.40 U2.41 U2.46 U3.2 U3.3 U3.4 U3.5 U3.6 U3.7 U3.14 U3.15 U3.16 U3.17 U3.19 U3.21 U3.22

## Polygon pours and split planes (outlines as drawn)
GND on L1 (Signal) "GND_L01_P010" (solid, pour order 10): 82,42.3 82.5,42.8 82.5,45 82.8,45.3 85.3,45.3 85.5,45.1 85.5,43.7 83.8,42 83.8,38.9 84,38.7 85.5,38.7 86.3,37.9 86.3,36 86,35.7 84.4,35.7 84.1,36 84.1,36.5 83.7,36.9 82.3,36.9 81.7,37.5 81.7,39.3 81,40 81,42 81.3,42.3
+3v3 on L1 (Signal) "+3V3_L01_P002" (solid, pour order 2): 86.3,34.5 86.3,33.4 86.2,33.3 84.7,33.3 82.5,31.1 78.8,31.1 78.6,31.3 78.6,32.5 78.8,32.7 79.2,32.7 79.5,33 79.5,39.2 79.7,39.4 80.9,39.4 81,39.3 81,32.843 81.158,32.7 83.3,32.7 84.2,33.6 84.2,35 84.4,35.2 86.1,35.2 86.3,35
+5 on L1 (Signal) "+5_L01_P001" (solid, pour order 1): 82.5,46.85 77.2,41.55 77.2,37.9 77.3,37.8 78.6,37.8 78.8,38 78.8,39.5 79.2,39.9 80.2,39.9 80.5,40.2 80.5,43.4 82.7,45.6 83.7,45.6 83.9,45.8 83.9,48 83.7,48.2 82.8,48.2 82.5,47.9
VBUS on L1 (Signal) "VBUS_L01_P000" (solid, pour order 0): 87.7,48.6 87.6,48.7 84.8,48.7 84.1,48 84.1,45.8 84.2,45.7 85.3,45.7 85.4,45.8 85.4,47.9 85.7,48.2 87.6,48.2 87.7,48.3
GND on L2 (GND) "GND_L02_P004" (solid, pour order 4): 55,31.5 ccw(c57.498,31.498) 57.5,29 87.5,29 ccw(c87.5,31.5) 90,31.5 90,61 ccw(c87.5,61) 87.5,63.5 57.5,63.5 ccw(c57.5,61) 55,61
GND on L3 (GND) "GND_L03_P008" (solid, pour order 8): 55,31.5 ccw(c57.498,31.498) 57.5,29 87.5,29 ccw(c87.5,31.5) 90,31.5 90,61 ccw(c87.5,61) 87.5,63.5 57.5,63.5 ccw(c57.5,61) 55,61

## Silkscreen, mask and mechanical layers (free items; w line width, h text height)
Top Overlay:
  text "SWD" at 75.5,53.7 h0.75
  text "USB" at 87.4,43.9 h0.75
  text "GPIO" at 59.4,33.5 h0.75
Mechanical 1:
  the board outline again, w0.508

## Text inside footprints (layer, text, board x,y; h text height)
D1: Mechanical 13 "+" at 87.242,32.617 h0.5 r90
D2: Mechanical 13 "+" at 74.867,46.758 h0.5